# Altium PCB ETML_A4_2L.PcbDoc (part 2 of 2)
Units mm, origin at the board's own origin, x right, y up, seen from the top; angles counter-clockwise.
Board outline 160 x 100 mm, 2 copper layers (Top Layer, Bottom Layer), stack 1.571 mm thick; 99 components, 40 nets, 218 pads, 32 vias.
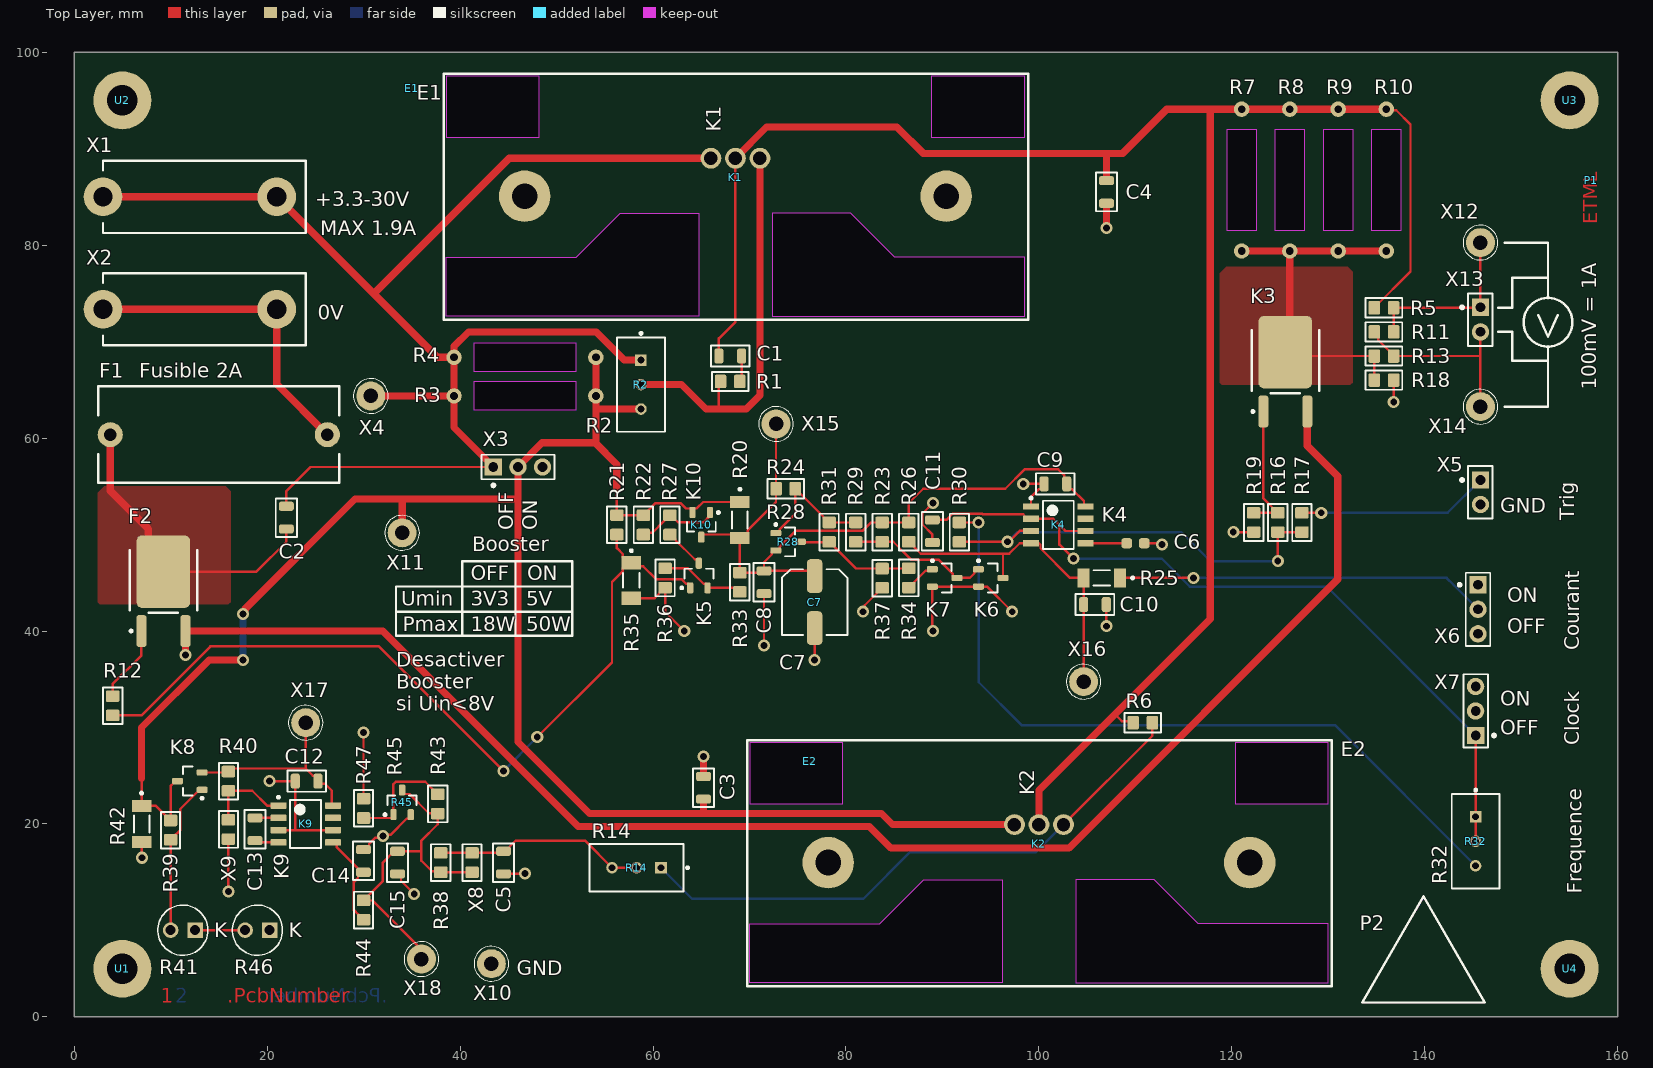
[diagram p0: Top Layer view]

## Silkscreen, mask and mechanical layers (free items; w line width, h text height) (continued)
Drill Drawing: (continued)
  lines w0.254: 183.769,113.216 185.462,113.216 185.462,114.91 183.769,114.91 183.769,113.216 ; 183.769,117.45 184.192,117.45 184.192,117.026 185.039,117.026 185.039,117.45 185.462,117.45 185.462,118.296 185.039,118.296 185.039,118.72 184.192,118.72 184.192,118.296 183.769,118.296 183.769,117.45 ; 183.769,125.493 184.615,124.646 185.462,125.493 184.615,126.34 183.769,125.493 ; 183.769,128.456 183.769,128.88 184.192,129.303 183.769,129.726 183.769,130.15 184.192,130.15 184.615,129.726 185.039,130.15 185.462,130.15 185.462,129.726 185.039,129.303 185.462,128.88 185.462,128.456 185.039,128.456 184.615,128.88 184.192,128.456 183.769,128.456 ; 183.769,133.96 185.462,133.96 184.615,132.266 183.769,133.96 ; 183.769,136.076 185.462,136.076 185.462,137.77 183.769,137.77 183.769,136.076 ; 183.769,139.886 184.615,140.31 185.462,139.886 185.039,140.733 185.462,141.58 184.615,141.156 183.769,141.58 184.192,140.733 183.769,139.886 ; 183.769,145.39 185.462,145.39 184.615,143.696 183.769,145.39 ; 183.769,147.93 184.192,147.93 184.615,147.506 185.039,147.93 185.462,147.93 185.039,148.353 185.462,148.776 185.039,148.776 184.615,149.2 184.192,148.776 183.769,148.776 184.192,148.353 183.769,147.93 ; 184.107,113.555 185.123,113.555 185.123,114.571 184.107,114.571 184.107,113.555 ; 184.107,145.051 185.123,145.051 184.615,144.035 184.107,145.051
  lines w0.381: 182.25,108.263 280.37,108.263 ; 182.25,150.173 280.37,150.173 ; 196.242,104.453 196.242,153.983 ; 209.955,104.453 209.955,153.983 ; 228.289,104.453 228.289,153.983 ; 241.138,104.453 241.138,153.983 ; 182.25,104.453 280.37,104.453 280.37,153.983 182.25,153.983 182.25,104.453
  text "Symbol" at 184.536,151.316 h1.83
  text "Count" at 197.385,151.316 h1.83
  text "Hole Size" at 211.098,151.316 h1.83
  text "Plated" at 229.432,151.316 h1.83
  text "Drill Layer Pair" at 242.281,151.316 h1.83
  text "9" at 197.385,147.506 h1.52
  text "0.700mm" at 211.098,147.506 h1.52
  text "PTH" at 229.432,147.506 h1.52
  text "Top Layer - Bottom Layer" at 242.281,147.506 h1.52
  text "32" at 197.385,143.696 h1.52
  text "0.711mm" at 211.098,143.696 h1.52
  text "PTH" at 229.432,143.696 h1.52
  text "Top Layer - Bottom Layer" at 242.281,143.696 h1.52
  text "12" at 197.385,139.886 h1.52
  text "0.800mm" at 211.098,139.886 h1.52
  text "PTH" at 229.432,139.886 h1.52
  text "Top Layer - Bottom Layer" at 242.281,139.886 h1.52
  text "13" at 197.385,136.076 h1.52
  text "1.000mm" at 211.098,136.076 h1.52
  text "PTH" at 229.432,136.076 h1.52
  text "Top Layer - Bottom Layer" at 242.281,136.076 h1.52
  text "4" at 197.385,132.266 h1.52
  text "1.050mm" at 211.098,132.266 h1.52
  text "PTH" at 229.432,132.266 h1.52
  text "Top Layer - Bottom Layer" at 242.281,132.266 h1.52
  text "2" at 197.385,128.456 h1.52
  text "1.300mm" at 211.098,128.456 h1.52
  text "PTH" at 229.432,128.456 h1.52
  text "Top Layer - Bottom Layer" at 242.281,128.456 h1.52
  text "6" at 197.385,124.646 h1.52
  text "1.397mm" at 211.098,124.646 h1.52
  text "PTH" at 229.432,124.646 h1.52
  text "Top Layer - Bottom Layer" at 242.281,124.646 h1.52
  text "9" at 197.385,120.836 h1.52
  text "1.500mm" at 211.098,120.836 h1.52
  text "PTH" at 229.432,120.836 h1.52
  text "Top Layer - Bottom Layer" at 242.281,120.836 h1.52
  text "4" at 197.385,117.026 h1.52
  text "2.000mm" at 211.098,117.026 h1.52
  text "PTH" at 229.432,117.026 h1.52
  text "Top Layer - Bottom Layer" at 242.281,117.026 h1.52
  text "4" at 197.385,113.216 h1.52
  text "2.667mm" at 211.098,113.216 h1.52
  text "PTH" at 229.432,113.216 h1.52
  text "Top Layer - Bottom Layer" at 242.281,113.216 h1.52
  text "4" at 197.385,109.406 h1.52
  text "3.200mm" at 211.098,109.406 h1.52
  text "PTH" at 229.432,109.406 h1.52
  text "Top Layer - Bottom Layer" at 242.281,109.406 h1.52
  text "99 Total" at 197.385,105.596 h1.52
Outline:
  the board outline again, w0.25

## Dimensions
160,0 to 160,100 on Top Dimensions
0,100 to 160,100 on Top Dimensions

## Text inside footprints (layer, text, board x,y; h text height)
P1: Top Layer "ETML" at 158.35,82.13 h2.54 r90; Top Solder "ETML" at 158.35,82.13 h2.54 r90
R41: Top Overlay "K" at 14.504,8.254 h1.52
R46: Top Overlay "K" at 22.254,8.254 h1.52